# EAGLE board eagle9s (EAGLE 6.5.0)
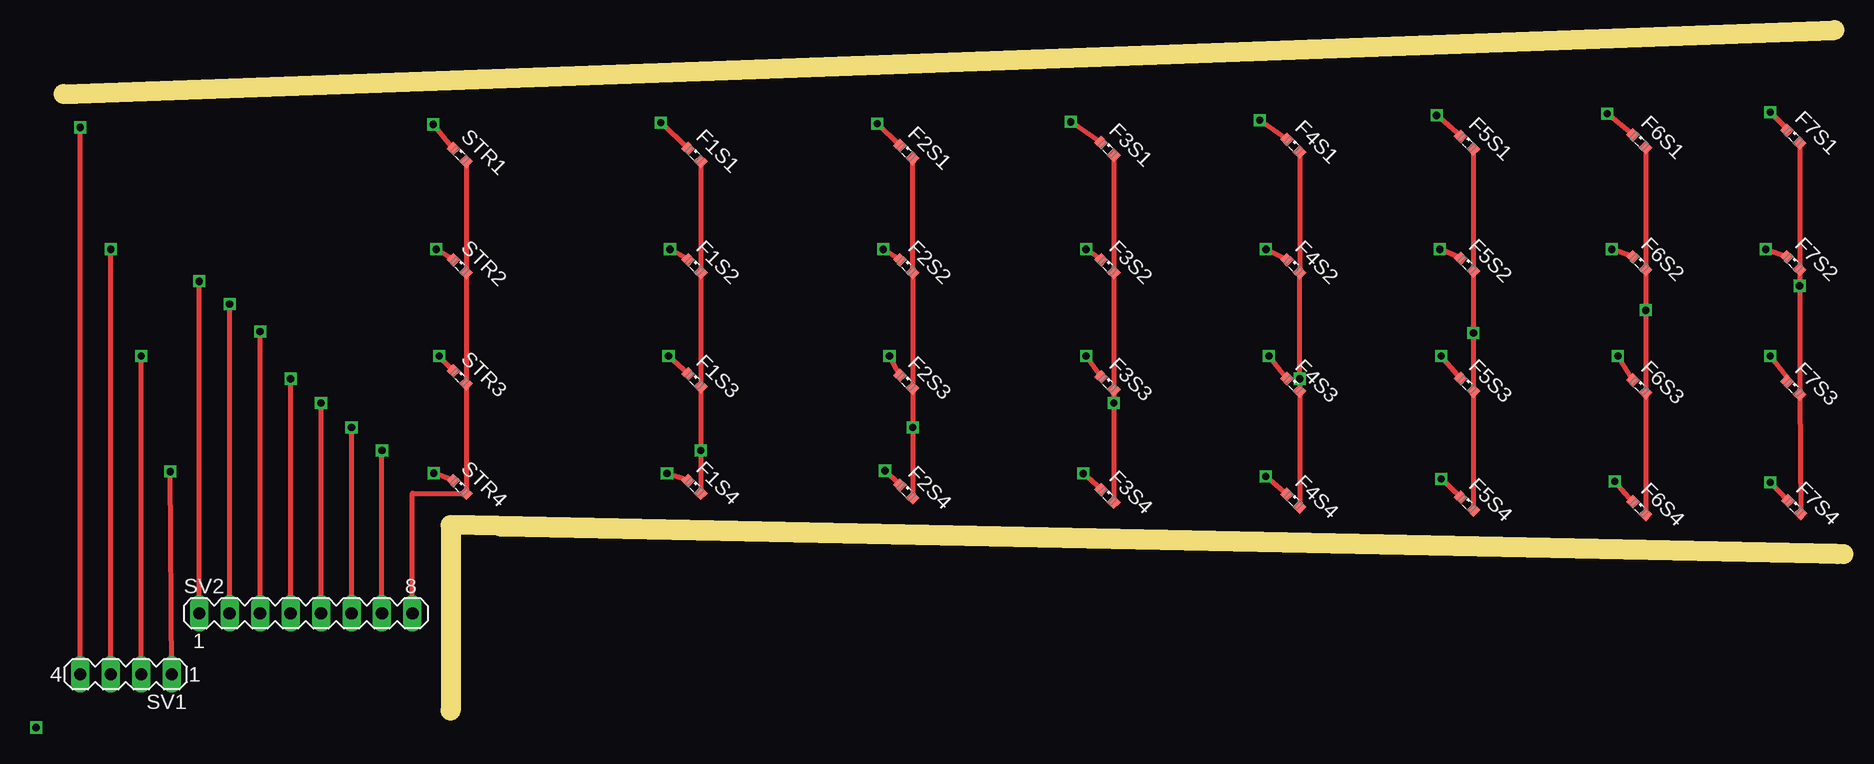
[diagram p0: board, top side]
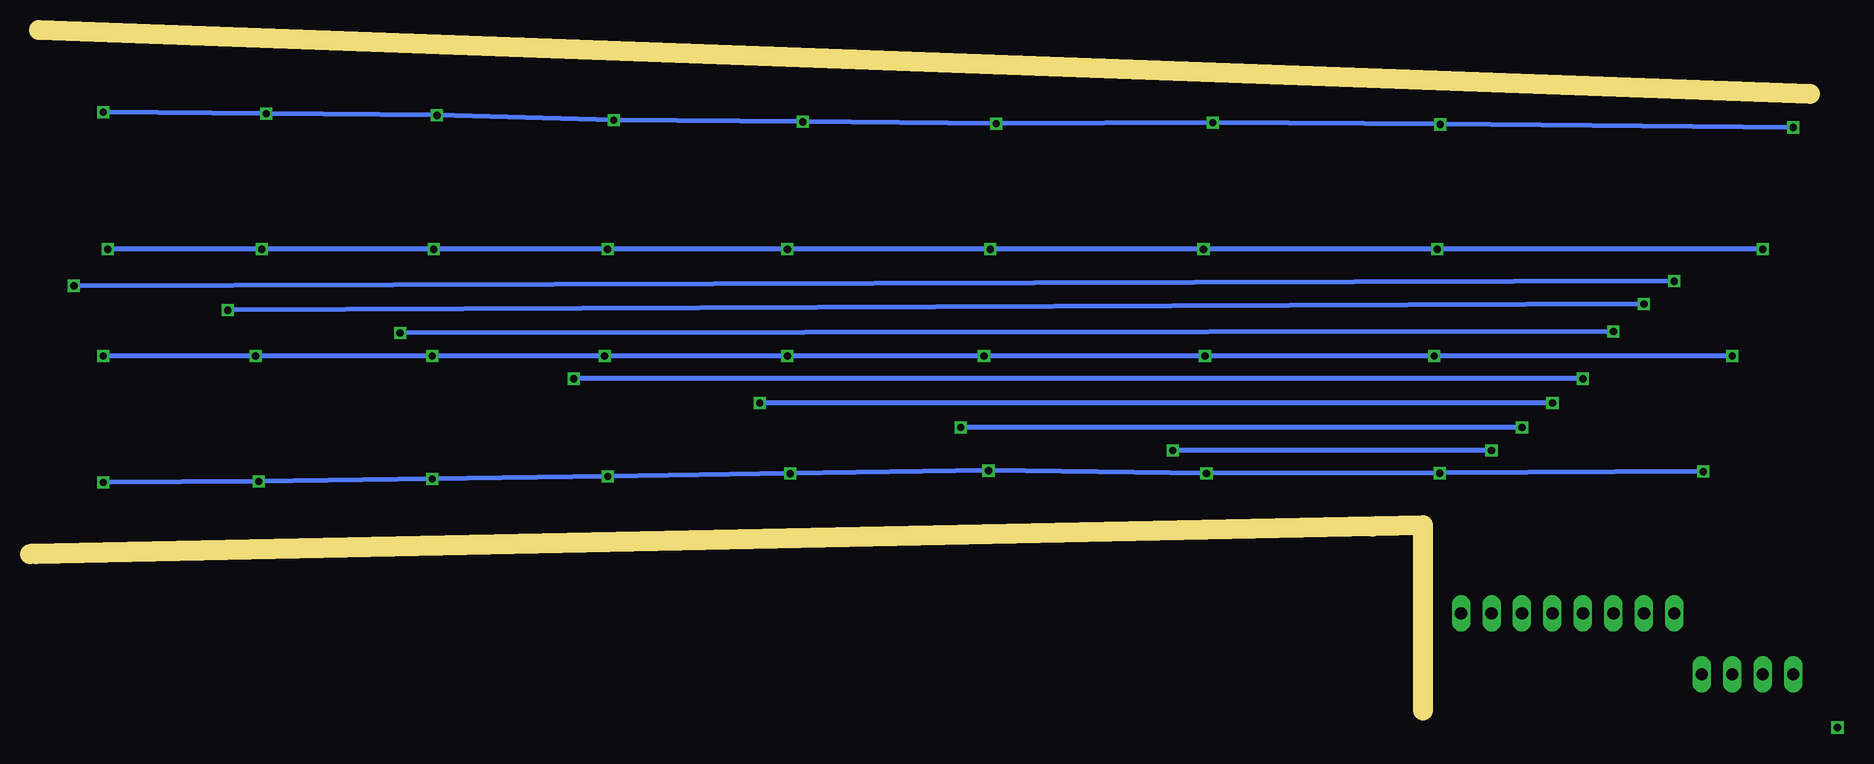
[diagram p1: board, bottom side, seen from below]

Size 148.34 x 56.77 mm. Coordinates in mm from the lower left corner, seen from the top.
Outline: 0,51.44 147.57,56.77
Outline: 147.83,13.08 32.26,15.49 32.26,0
Outline: 36.45,15.37 148.34,13.08
Copper layers (1*16): Top 0.035mm / dielectric 1.5mm / Bottom 0.035mm
Design rules "default": minimum track width 10mil, minimum drill 24mil, track to track 8mil, track to pad 8mil, pad to pad 8mil, via to via 8mil, smd to smd 8mil, copper to edge 40mil, drill to drill 8mil, minimum pad ring 10mil, minimum via ring 8mil, stop-mask expansion 4mil, vias tented up to drill 0mil, thermal gap 10mil

## Footprints (pad centres in the part's own frame; a part is rotated, then mirrored left to right if it is on the bottom)
LED_SML0603 = smd 0.8 x 0.8: A 0.75,0; C -0.75,0
MA04-1 = drill 1.016 long: 1 -3.81,0; 2 -1.27,0; 3 1.27,0; 4 3.81,0
MA08-1 = drill 1.016 long: 1 -8.89,0; 2 -6.35,0; 3 -3.81,0; 4 -1.27,0; 5 1.27,0; 6 3.81,0; 7 6.35,0; 8 8.89,0

## Placement (x,y rotation side)
F1S1  [LED_SML0603]  52.58,46.36 315 top
F1S2  [LED_SML0603]  52.58,37.08 315 top
F1S3  [LED_SML0603]  52.58,27.56 315 top
F1S4  [LED_SML0603]  52.58,18.67 315 top
F2S1  [LED_SML0603]  70.23,46.61 315 top
F2S2  [LED_SML0603]  70.23,37.08 315 top
F2S3  [LED_SML0603]  70.23,27.43 315 top
F2S4  [LED_SML0603]  70.23,18.29 315 top
F3S1  [LED_SML0603]  87,46.86 315 top
F3S2  [LED_SML0603]  87,37.08 315 top
F3S3  [LED_SML0603]  87,27.31 315 top
F3S4  [LED_SML0603]  87,17.91 315 top
F4S1  [LED_SML0603]  102.49,47.12 315 top
F4S2  [LED_SML0603]  102.49,37.08 315 top
F4S3  [LED_SML0603]  102.49,27.18 315 top
F4S4  [LED_SML0603]  102.49,17.53 315 top
F5S1  [LED_SML0603]  116.97,47.37 315 top
F5S2  [LED_SML0603]  116.97,37.21 315 top
F5S3  [LED_SML0603]  116.97,27.18 315 top
F5S4  [LED_SML0603]  116.97,17.27 315 top
F6S1  [LED_SML0603]  131.32,47.5 315 top
F6S2  [LED_SML0603]  131.32,37.34 315 top
F6S3  [LED_SML0603]  131.32,27.05 315 top
F6S4  [LED_SML0603]  131.32,16.89 315 top
F7S1  [LED_SML0603]  144.15,47.88 315 top
F7S2  [LED_SML0603]  144.15,37.34 315 top
F7S3  [LED_SML0603]  144.15,26.92 315 top
F7S4  [LED_SML0603]  144.23,16.98 315 top
STR1  [LED_SML0603]  33.02,46.36 315 top
STR2  [LED_SML0603]  33.02,37.08 315 top
STR3  [LED_SML0603]  33.02,27.81 315 top
STR4  [LED_SML0603]  33.02,18.67 315 top
SV1  [MA04-1]  5.21,3.05 180 top
SV2  [MA08-1]  20.19,8.13 0 top

## Library data of the parts
F1S1-F1S4 F2S1-F2S4 F3S1-F3S4 F4S1-F4S4 F5S1-F5S4 F6S1-F6S4 F7S1-F7S4 STR1-STR4 = eagle-ltspice; SPICEMODEL: NONE; SPICEPREFIX: D; SPICETYPE: diode
SV1 SV2 = con-lstb; OC_FARNELL: unknown; OC_NEWARK: unknown

## Nets
A0: F2S1.A F2S2.A F2S3.A F2S4.A SV2.6
A1: F1S1.A F1S2.A F1S3.A F1S4.A SV2.7
A2: STR1.A STR2.A STR3.A STR4.A SV2.8
N$2: F1S3.C F2S3.C F3S3.C F4S3.C F5S3.C F6S3.C F7S3.C STR3.C SV1.2
N$3: F1S2.C F2S2.C F3S2.C F4S2.C F5S2.C F6S2.C F7S2.C STR2.C SV1.3
N$8: F1S1.C F2S1.C F3S1.C F4S1.C F5S1.C F6S1.C F7S1.C STR1.C SV1.4
N$10: F7S1.A F7S2.A F7S3.A F7S4.A SV2.1
N$23: F6S1.A F6S2.A F6S3.A F6S4.A SV2.2
N$25: F4S1.A F4S2.A F4S3.A F4S4.A SV2.4
N$26: F3S1.A F3S2.A F3S3.A F3S4.A SV2.5
N$28: F1S4.C F2S4.C F3S4.C F4S4.C F5S4.C F6S4.C F7S4.C STR4.C SV1.1
N$35: F5S1.A F5S2.A F5S3.A F5S4.A SV2.3

## Tracks (layer width: path | path; a pad name or v marks a point on that pad's centre or on a via)
A0  (via drill 0.6)
  Top 0.406: F2S1.A F2S2.A F2S3.A v70.76,23.62 F2S4.A | SV2.6 v24,23.62
  Bottom 0.406: v24,23.62 v70.76,23.62
A1  (via drill 0.6)
  Top 0.406: F1S1.A F1S2.A F1S3.A v53.11,21.72 F1S4.A | SV2.7 v26.54,21.72
  Bottom 0.406: v26.54,21.72 v53.11,21.72
A2
  Top 0.406: STR1.A STR2.A STR3.A STR4.A 29.08,18.14 SV2.8
N$2  (via drill 0.6)
  Top 0.406: STR3.C v31.32,29.59 | v142.24,29.59 143.62,27.84 F7S3.C | F6S3.C v129.54,29.59 | F5S3.C v114.81,29.59 | F4S3.C v100.46,29.59 | F3S3.C v85.22,29.59 | F2S3.C v68.83,29.59 | F1S3.C v50.42,29.59 | SV1.2 v6.48,29.59
  Bottom 0.406: v142.24,29.59 v129.54,29.59 v114.81,29.59 v100.46,29.59 v85.22,29.59 v68.83,29.59 v50.42,29.59 v31.32,29.59 v6.48,29.59
N$3  (via drill 0.6)
  Top 0.406: STR2.C v31.07,38.48 | v141.86,38.48 F7S2.C | F6S2.C v129.03,38.48 | F5S2.C v114.68,38.48 | F4S2.C v100.2,38.48 | F3S2.C v85.22,38.48 | F2S2.C v68.33,38.48 | F1S2.C v50.55,38.48 | SV1.3 v3.94,38.48
  Bottom 0.406: v141.86,38.48 v129.03,38.48 v114.68,38.48 v100.2,38.48 v85.22,38.48 v68.33,38.48 v50.55,38.48 v31.07,38.48 v3.94,38.48
N$8  (via drill 0.6)
  Top 0.406: STR1.C v30.82,48.9 | v142.24,49.91 143.62,48.54 F7S1.C | F6S1.C v128.65,49.78 | F5S1.C v114.43,49.65 | F4S1.C v99.69,49.26 | F3S1.C v83.94,49.11 | F2S1.C v67.82,48.95 | F1S1.C v49.78,49.04 | SV1.4 v1.4,48.64
  Bottom 0.406: v142.24,49.91 v128.65,49.78 v114.43,49.65 v99.69,49.26 v83.94,49.11 v67.82,48.95 v49.78,49.04 v30.82,48.9 v1.4,48.64
N$10  (via drill 0.6)
  Top 0.406: F7S1.A F7S2.A v144.68,35.43 F7S3.A F7S4.A | SV2.1 v11.3,35.81
  Bottom 0.406: v11.3,35.81 v144.68,35.43
N$23  (via drill 0.6)
  Top 0.406: F6S1.A F6S2.A v131.85,33.4 F6S3.A F6S4.A | SV2.2 v13.84,33.91
  Bottom 0.406: v13.84,33.91 v131.85,33.4
N$25  (via drill 0.6)
  Top 0.406: F4S1.A F4S2.A v103.02,27.69 F4S3.A F4S4.A | SV2.4 v18.92,27.69
  Bottom 0.406: v18.92,27.69 v103.02,27.69
N$26  (via drill 0.6)
  Top 0.406: F3S1.A F3S2.A F3S3.A v87.53,25.65 F3S4.A | SV2.5 v21.46,25.65
  Bottom 0.406: v21.46,25.65 v87.53,25.65
N$28  (via drill 0.6)
  Top 0.406: STR4.C v30.86,19.81 | v142.24,19.05 F7S4.C | F6S4.C v129.28,19.12 | F5S4.C v114.81,19.33 | F4S4.C v100.2,19.55 | F3S4.C v84.97,19.78 | F2S4.C v68.46,20.02 | F1S4.C v50.29,19.78 | SV1.1 v8.89,19.94
  Bottom 0.406: v142.24,19.05 v129.28,19.12 v114.81,19.33 v100.2,19.55 v84.97,19.78 v68.46,20.02 v50.29,19.78 v30.86,19.81 v8.89,19.94
N$35  (via drill 0.6)
  Top 0.406: F5S1.A F5S2.A v117.5,31.5 F5S3.A F5S4.A | SV2.3 v16.38,31.62
  Bottom 0.406: v16.38,31.62 v117.5,31.5
S$1  (via drill 0.6)
  other vias: -2.29,-1.4